# EAGLE board mech-mockup (EAGLE 6.5.0)
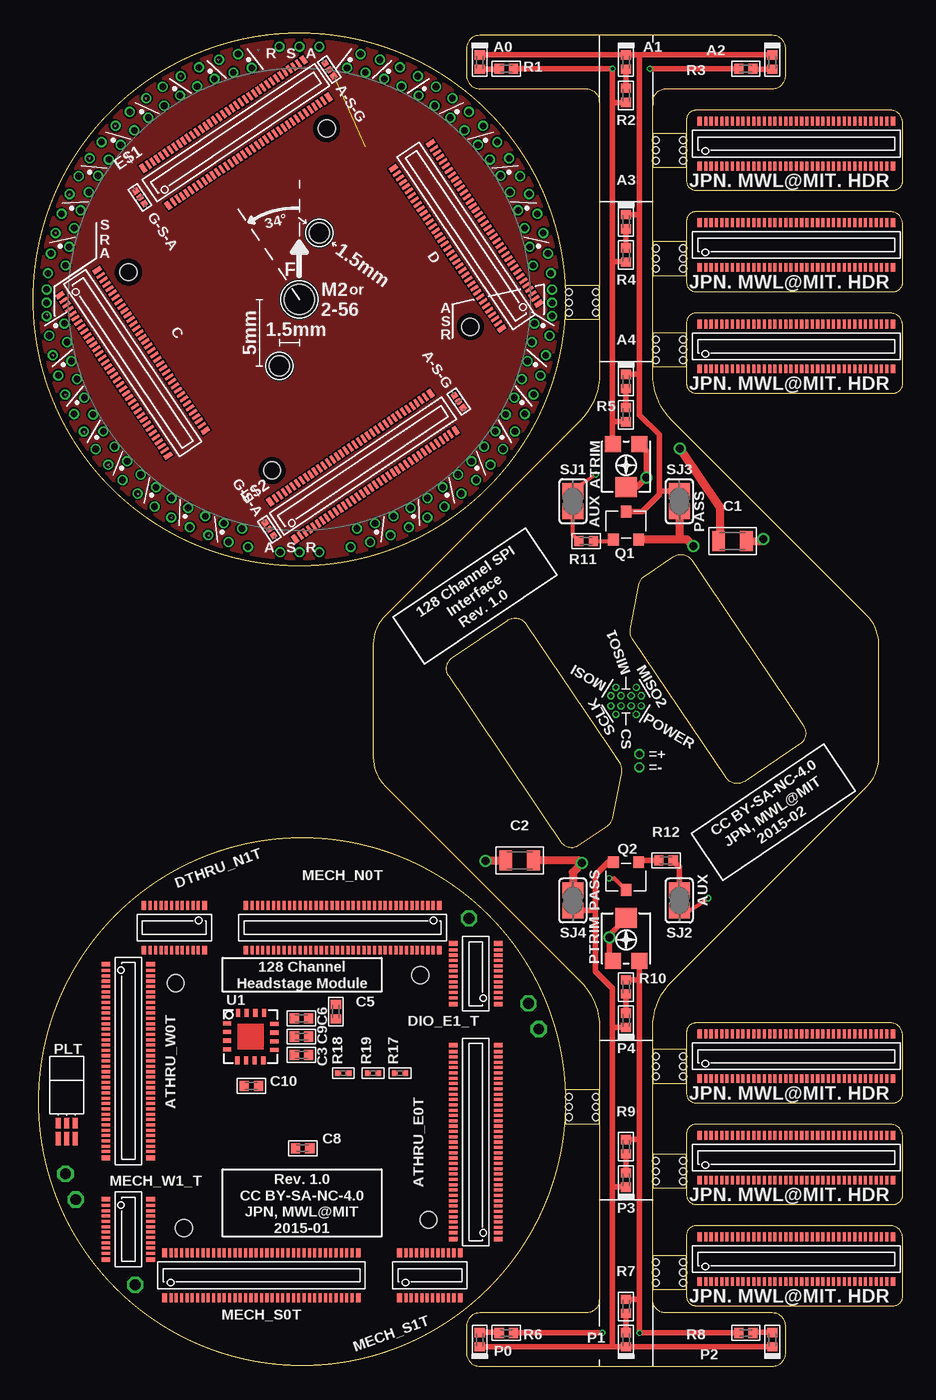
[diagram p0: board, top side]
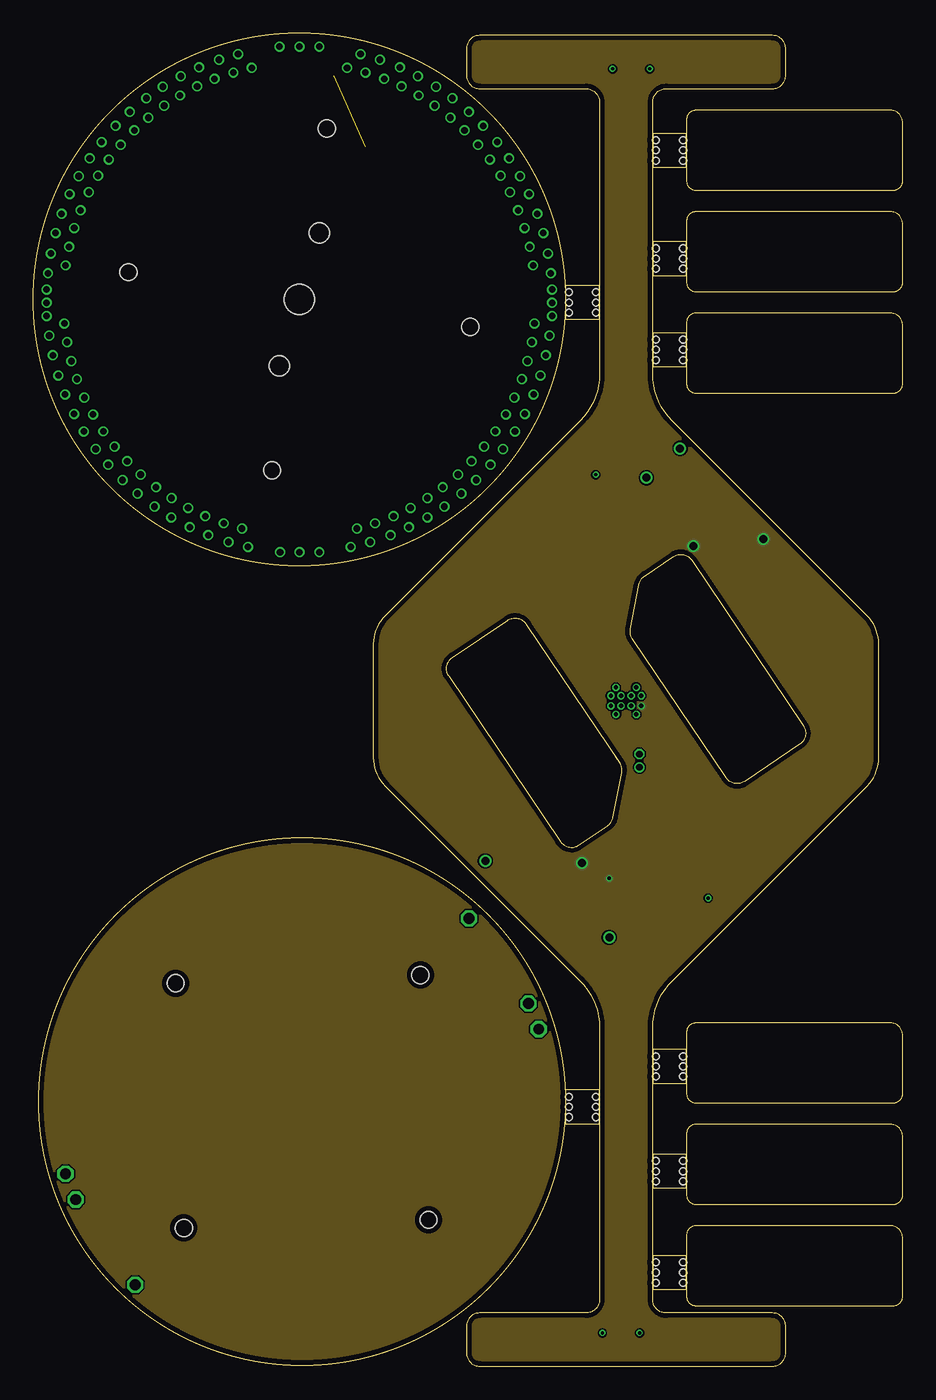
[diagram p1: board, inner layer Route2]
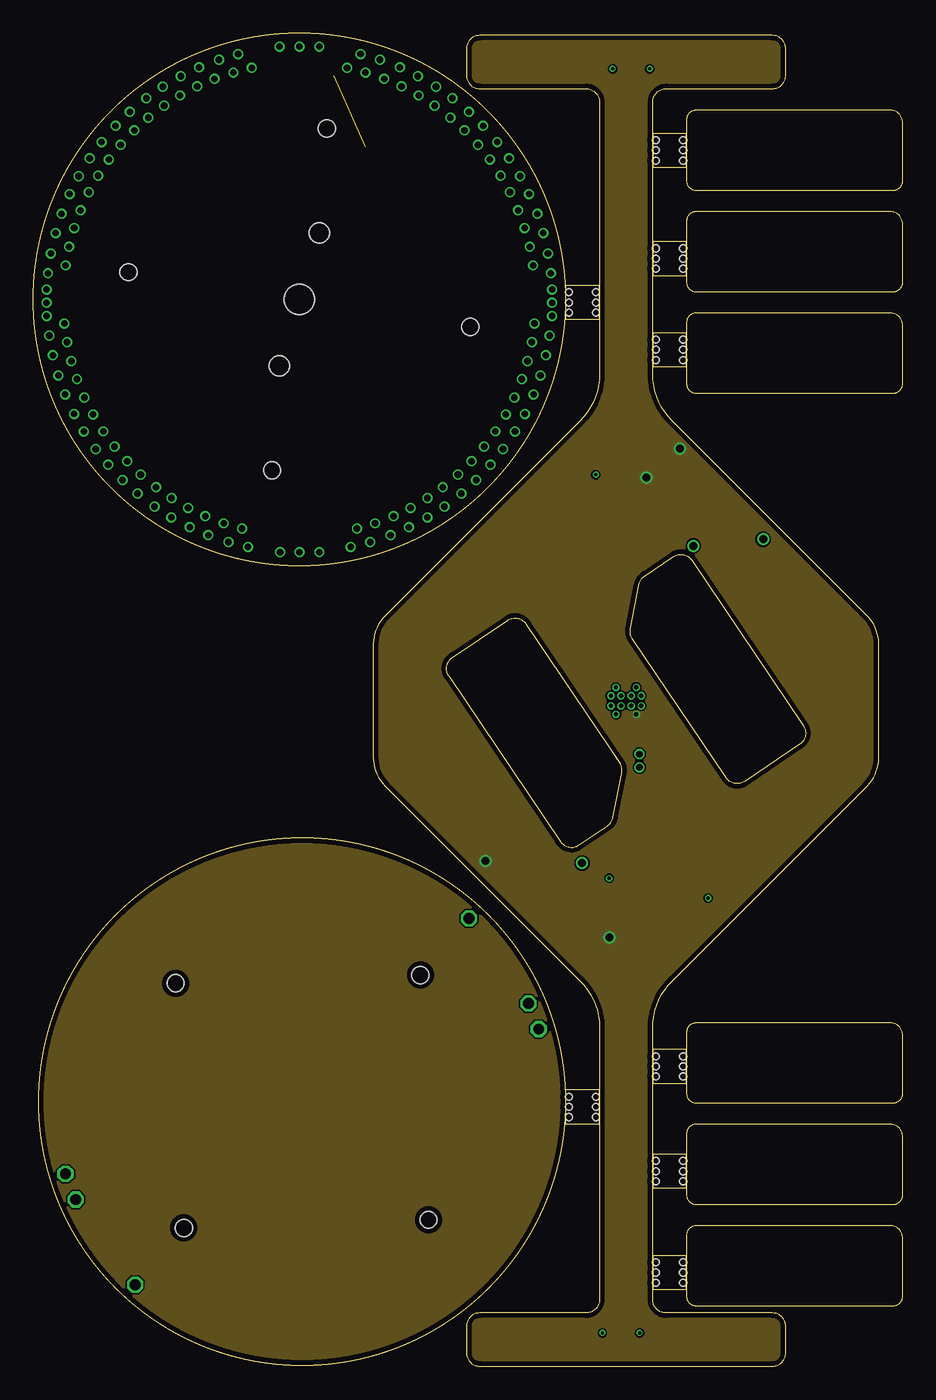
[diagram p2: board, inner layer Route15]
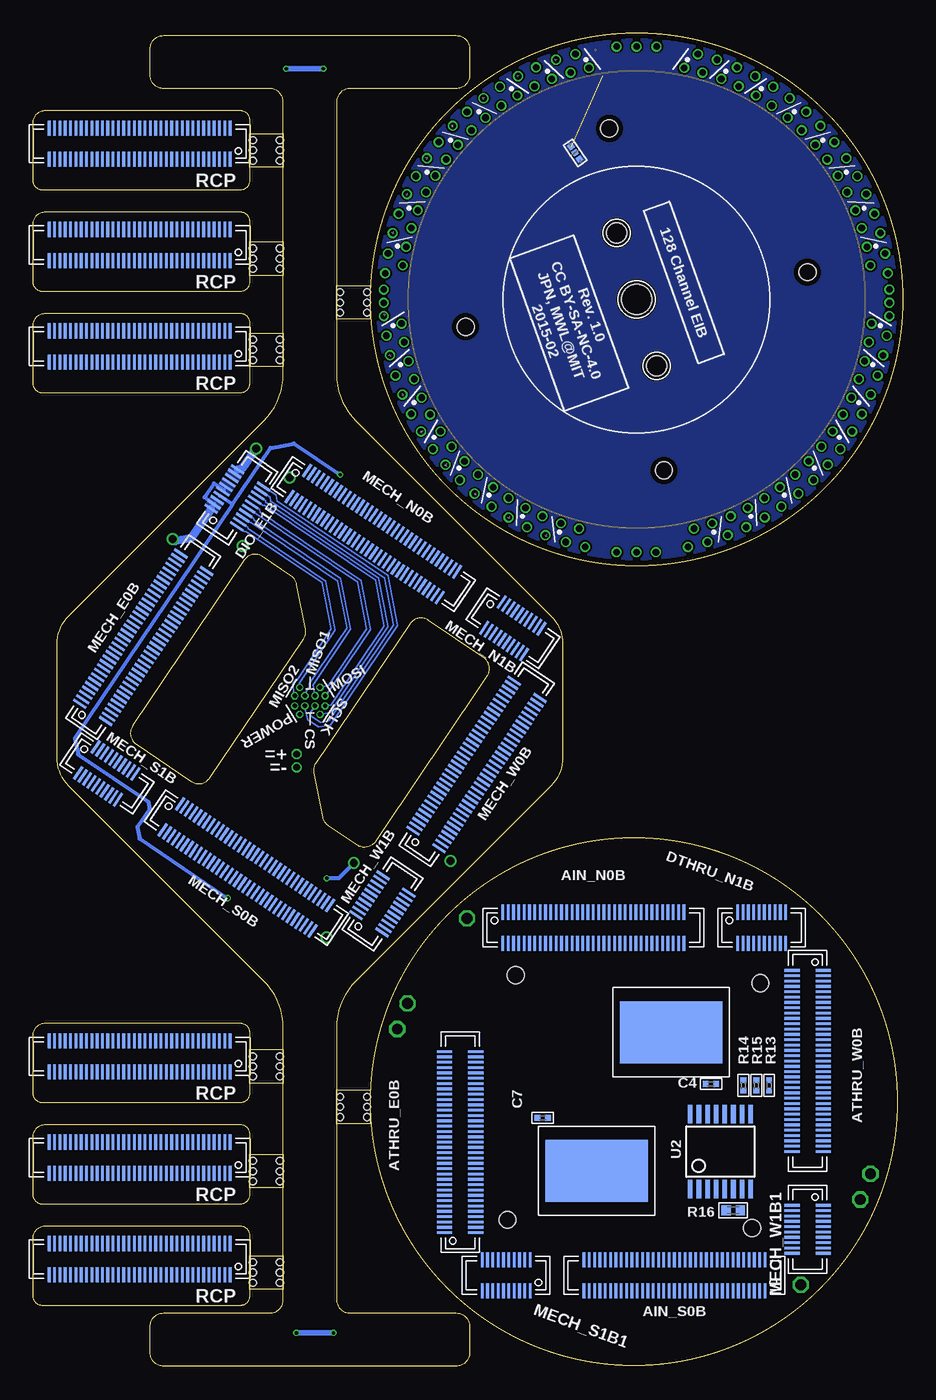
[diagram p3: board, bottom side, seen from below]

Size 65.35 x 100.16 mm. Coordinates in mm from the lower left corner, seen from the top.
Outline: 44.07,45.35 37.04,55.78 arc90 35.65,56.05 31.5,53.26 arc90 31.23,51.87 39.62,39.43 arc90 41.01,39.16 43.15,40.61 arc45 43.57,41.25 44.23,44.6 arc45 44.07,45.35
Outline: 44.07,45.35 43.75,45.83
Outline: 47.56,96 55.56,96 arc90 56.56,97 56.56,99 arc90 55.56,100 33.56,100 arc90 32.56,99 32.56,97 arc90 33.56,96 41.56,96 arc-90 42.56,95 42.56,74.57 arc-45 41.09,71.04 26.43,56.38 arc45 25.56,54.26 25.56,45.74 arc45 26.43,43.62 41.09,28.96 arc-45 42.56,25.43 42.56,5 arc-90 41.56,4 33.56,4 arc90 32.56,3 32.56,1 arc90 33.56,0 55.56,0 arc90 56.56,1 56.56,3 arc90 55.56,4 47.56,4 arc-90 46.56,5 46.56,25.43 arc-45 48.02,28.96 62.68,43.62 arc45 63.56,45.74 63.56,54.26 arc45 62.68,56.38 48.02,71.04 arc-45 46.56,74.57 46.56,95 arc-90 47.56,96
Outline: 52.08,44.22 45.04,54.65 arc-45 44.88,55.4 45.54,58.75 arc-45 45.96,59.39 48.1,60.84 arc-90 49.49,60.57 57.88,48.13 arc-90 57.61,46.74 53.46,43.95 arc-90 52.08,44.22
Outline: 40.02,81.21 40.02,78.67 42.56,78.67 42.56,81.21 40.02,81.21
Outline: 40.02,20.75 40.02,18.21 42.56,18.21 42.56,20.75 40.02,20.75
Outline: 49.8,88.37 64.64,88.37 arc90 65.35,89.08 65.35,93.47 arc90 64.44,94.37 49.8,94.37 arc90 49.1,93.66 49.1,89.08 arc90 49.8,88.37
Outline: 49.8,80.75 64.64,80.75 arc90 65.35,81.46 65.35,85.85 arc90 64.44,86.75 49.8,86.75 arc90 49.1,86.04 49.1,81.46 arc90 49.8,80.75
Outline: 49.8,73.13 64.64,73.13 arc90 65.35,73.84 65.35,78.23 arc90 64.44,79.13 49.8,79.13 arc90 49.1,78.42 49.1,73.84 arc90 49.8,73.13
Outline: 49.8,19.79 64.64,19.79 arc90 65.35,20.5 65.35,24.89 arc90 64.44,25.79 49.8,25.79 arc90 49.1,25.08 49.1,20.5 arc90 49.8,19.79
Outline: 49.8,12.17 64.64,12.17 arc90 65.35,12.88 65.35,17.27 arc90 64.44,18.17 49.8,18.17 arc90 49.1,17.46 49.1,12.88 arc90 49.8,12.17
Outline: 49.8,4.55 64.64,4.55 arc90 65.35,5.26 65.35,9.65 arc90 64.44,10.55 49.8,10.55 arc90 49.1,9.84 49.1,5.26 arc90 49.8,4.55
Outline: 46.56,92.64 46.56,90.1 49.1,90.1 49.1,92.64 46.56,92.64
Outline: 46.56,84.51 46.56,81.97 49.1,81.97 49.1,84.51 46.56,84.51
Outline: 46.56,77.65 46.56,75.11 49.1,75.11 49.1,77.65 46.56,77.65
Outline: 46.56,23.8 46.56,21.26 49.1,21.26 49.1,23.8 46.56,23.8
Outline: 46.56,15.93 46.56,13.39 49.1,13.39 49.1,15.93 46.56,15.93
Outline: 46.56,8.31 46.56,5.77 49.1,5.77 49.1,8.31 46.56,8.31
Outline: circle at 20,80.16 radius 20
Outline: circle at 20,80.16 radius 20
Outline: circle at 20.2,19.89 radius 19.81
Copper layers (1*2*15*16): Top 0.035559375mm / dielectric 0.17018125mm / Route2 0.01778125mm / dielectric 47mil / Route15 0.01778125mm / dielectric 0.17018125mm / Bottom 0.035559375mm
Design rules "ohs-park-4-layer": minimum track width 5mil, minimum drill 10mil, track to track 5mil, track to pad 5mil, pad to pad 5mil, via to via 5mil, smd to smd 5mil, copper to edge 15mil, drill to drill 5mil, minimum pad ring 4mil, minimum via ring 4mil, stop-mask expansion 4mil, vias tented up to drill 100mil, thermal gap 10mil
Net classes: 1 thick: width 0.102 mm
Holes 1.27 mm at 22.06,93.01 32.85,78.11 17.94,67.32 7.15,82.22 10.7,28.78 29.09,29.39 29.7,11 11.31,10.39
Holes 0.51 mm at 40.27,80.7 40.27,79.94 40.27,79.17 42.3,79.17 42.3,79.94 42.3,80.7 40.27,20.25 40.27,19.48 40.27,18.72 42.3,18.72 42.3,19.48 42.3,20.25 46.81,92.13 46.81,91.37 46.81,90.6 48.84,90.6 48.84,91.37 48.84,92.13 46.81,84 46.81,83.24 46.81,82.48 48.84,82.48 48.84,83.24 48.84,84 46.81,77.14 46.81,76.38 46.81,75.62 48.84,75.62 48.84,76.38 48.84,77.14 46.81,23.29 46.81,22.53 46.81,21.77 48.84,21.77 48.84,22.53 48.84,23.29 46.81,15.42 46.81,14.66 46.81,13.9 48.84,13.9 48.84,14.66 48.84,15.42 46.81,7.8 46.81,7.04 46.81,6.28 48.84,6.28 48.84,7.04 48.84,7.8

## Footprints (pad centres in the part's own frame; a part is rotated, then mirrored left to right if it is on the bottom)
LED-0402 = smd 0.762 x 0.686: A 0,-0.533; C 0,0.533
GOLDPIN_0.5ID_0.7OD = drill 0.5 pad 0.7: P$1 0,0
DF40-70REC = smd 0.2 x 1.14: 1 -6.8,1.17; 2 -6.4,1.17; 3 -6,1.17; 4 -5.6,1.17; 5 -5.2,1.17; 6 -4.8,1.17; 7 -4.4,1.17; 8 -4,1.17; 9 -3.6,1.17; 10 -3.2,1.17; 11 -2.8,1.17; 12 -2.4,1.17; 13 -2,1.17; 14 -1.6,1.17; 15 -1.2,1.17; 16 -0.8,1.17; 17 -0.4,1.17; 18 0,1.17; 19 0.4,1.17; 20 0.8,1.17; 21 1.2,1.17; 22 1.6,1.17; 23 2,1.17; 24 2.4,1.17; 25 2.8,1.17; 26 3.2,1.17; 27 3.6,1.17; 28 4,1.17; 29 4.4,1.17; 30 4.8,1.17; 31 5.2,1.17; 32 5.6,1.17; 33 6,1.17; 34 6.4,1.17; 35 6.8,1.17; 36 6.8,-1.17; 37 6.4,-1.17; 38 6,-1.17; 39 5.6,-1.17; 40 5.2,-1.17; 41 4.8,-1.17; 42 4.4,-1.17; 43 4,-1.17; 44 3.6,-1.17; 45 3.2,-1.17; 46 2.8,-1.17; 47 2.4,-1.17; 48 2,-1.17; 49 1.6,-1.17; 50 1.2,-1.17; 51 0.8,-1.17; 52 0.4,-1.17; 53 0,-1.17; 54 -0.4,-1.17; 55 -0.8,-1.17; 56 -1.2,-1.17; 57 -1.6,-1.17; 58 -2,-1.17; 59 -2.4,-1.17; 60 -2.8,-1.17; 61 -3.2,-1.17; 62 -3.6,-1.17; 63 -4,-1.17; 64 -4.4,-1.17; 65 -4.8,-1.17; 66 -5.2,-1.17; 67 -5.6,-1.17; 68 -6,-1.17; 69 -6.4,-1.17; 70 -6.8,-1.17
DF40-70HEAD = smd 0.23 x 0.66: 1 -6.8,-1.685; 2 -6.4,-1.685; 3 -6,-1.685; 4 -5.6,-1.685; 5 -5.2,-1.685; 6 -4.8,-1.685; 7 -4.4,-1.685; 8 -4,-1.685; 9 -3.6,-1.685; 10 -3.2,-1.685; 11 -2.8,-1.685; 12 -2.4,-1.685; 13 -2,-1.685; 14 -1.6,-1.685; 15 -1.2,-1.685; 16 -0.8,-1.685; 17 -0.4,-1.685; 18 0,-1.685; 19 0.4,-1.685; 20 0.8,-1.685; 21 1.2,-1.685; 22 1.6,-1.685; 23 2,-1.685; 24 2.4,-1.685; 25 2.8,-1.685; 26 3.2,-1.685; 27 3.6,-1.685; 28 4,-1.685; 29 4.4,-1.685; 30 4.8,-1.685; 31 5.2,-1.685; 32 5.6,-1.685; 33 6,-1.685; 34 6.4,-1.685; 35 6.8,-1.685; 36 6.8,1.685; 37 6.4,1.685; 38 6,1.685; 39 5.6,1.685; 40 5.2,1.685; 41 4.8,1.685; 42 4.4,1.685; 43 4,1.685; 44 3.6,1.685; 45 3.2,1.685; 46 2.8,1.685; 47 2.4,1.685; 48 2,1.685; 49 1.6,1.685; 50 1.2,1.685; 51 0.8,1.685; 52 0.4,1.685; 53 0,1.685; 54 -0.4,1.685; 55 -0.8,1.685; 56 -1.2,1.685; 57 -1.6,1.685; 58 -2,1.685; 59 -2.4,1.685; 60 -2.8,1.685; 61 -3.2,1.685; 62 -3.6,1.685; 63 -4,1.685; 64 -4.4,1.685; 65 -4.8,1.685; 66 -5.2,1.685; 67 -5.6,1.685; 68 -6,1.685; 69 -6.4,1.685; 70 -6.8,1.685 | smd 0.35 x 0.66: M1 -7.275,-1.685; M2 7.275,-1.685; M3 7.275,1.685; M4 -7.275,1.685
EIA/EIAJ = smd 1.2 x 1.2: A -1,-1.8; E 1,-1.8 | smd 1.6 x 1.5: S 0,1.45
0805 = smd 0.965 x 1.524: 1 -1.041,0; 2 1.041,0
0402 = smd 0.686 x 0.762: 1 -0.533,0; 2 0.533,0
0201 = smd 0.432 x 0.432: 1 -0.394,0; 2 0.394,0
SPI_WIRE+ = drill 0.33 octagon: P$1 0,0
SPI_WIRE- = drill 0.33: P$1 0,0
DF40-20HEAD = smd 0.23 x 0.66: 1 -1.8,-1.685; 2 -1.4,-1.685; 3 -1,-1.685; 4 -0.6,-1.685; 5 -0.2,-1.685; 6 0.2,-1.685; 7 0.6,-1.685; 8 1,-1.685; 9 1.4,-1.685; 10 1.8,-1.685; 11 1.8,1.685; 12 1.4,1.685; 13 1,1.685; 14 0.6,1.685; 15 0.2,1.685; 16 -0.2,1.685; 17 -0.6,1.685; 18 -1,1.685; 19 -1.4,1.685; 20 -1.8,1.685 | smd 0.35 x 0.66: M1 -2.275,-1.685; M2 2.275,-1.685; M3 2.275,1.685; M4 -2.275,1.685
DF40-20REC = smd 0.2 x 1.14: 1 -1.8,1.17; 2 -1.4,1.17; 3 -1,1.17; 4 -0.6,1.17; 5 -0.2,1.17; 6 0.2,1.17; 7 0.6,1.17; 8 1,1.17; 9 1.4,1.17; 10 1.8,1.17; 11 1.8,-1.17; 12 1.4,-1.17; 13 1,-1.17; 14 0.6,-1.17; 15 0.2,-1.17; 16 -0.2,-1.17; 17 -0.6,-1.17; 18 -1,-1.17; 19 -1.4,-1.17; 20 -1.8,-1.17
RHD2164_COB_MECH = smd 7.722 x 4.674: CENTER 0,0
TESTPOINT_SMALL = drill 0.813 octagon: 1 0,0
OMNETICS_PZN-06-AA = smd 0.381 x 0.762: B1 0.635,-1.016; B2 0,-1.016; B3 -0.635,-1.016 | smd 0.381 x 1.016: T1 0.635,-2.159; T2 0,-2.159; T3 -0.635,-2.159
SOT23-GSD = smd 0.8 x 0.9: D 0,0; G -0.95,-2.1; S 0.95,-2.1
SJ = smd 1.168 x 1.6: 1 -0.762,0; 2 0.762,0
SJ_2_0201 = smd 0.432 x 0.432: 1 -0.559,0; 2 0.559,0; COM 0,0
TETRODE_128_0.5ID_0.7OD = drill 0.5 pad 0.703: 0 0.724,17.743; 1 1.562,18.934; 2 2.14,17.628; 3 3.058,18.748
ADXL335 = smd 0.61 x 0.305: COM1 -1.775,-0.3; NC1 -1.775,1; NC2 -1.775,-0.95; NC3 1.775,-1; NC4 1.775,0.3; ST -1.775,0.35; XOUT 1.775,0.95; YOUT 1.775,-0.35 | smd 0.305 x 0.61: COM2 -1,-1.775; COM3 -0.35,-1.775; COM4 0.3,-1.775; NC5 1,1.775; NC6 -0.95,1.775; VS1 0.35,1.775; VS2 -0.3,1.775; ZOUT 0.95,-1.775
TSSOP-16 = smd 0.348 x 1.397: 1 -2.273,-2.814; 2 -1.623,-2.815; 3 -0.973,-2.815; 4 -0.323,-2.815; 5 0.327,-2.815; 6 0.977,-2.815; 7 1.627,-2.815; 8 2.277,-2.815; 9 2.277,2.825; 10 1.627,2.825; 11 0.977,2.825; 12 0.327,2.825; 13 -0.323,2.825; 14 -0.973,2.825; 15 -1.623,2.825; 16 -2.273,2.825
EIB_MOUNT_A = hole 2.261: 0,0 | hole 1.5: 1.5,5; -1.5,-5

## Placement (x,y rotation side)
A0  RED  [LED-0402]  33.56,98 0 top
A1  RED  [LED-0402]  44.56,98 0 top
A2  RED  [LED-0402]  55.56,98 0 top
A3  RED  [LED-0402]  44.56,86 0 top
A4  RED  [LED-0402]  44.56,74 0 top
AGND_A0  LRG_GP  [GOLDPIN_0.5ID_0.7OD]  21.5,99.16 0 top
AGND_A1  LRG_GP  [GOLDPIN_0.5ID_0.7OD]  1,78.91 0 top
AGND_B0  LRG_GP  [GOLDPIN_0.5ID_0.7OD]  18.55,61.16 34 top
AGND_B1  LRG_GP  [GOLDPIN_0.5ID_0.7OD]  39,80.91 34 top
AIN_N0B  DF40REC  [DF40-70REC]  23.25,32.95 0 bottom
AIN_S0B  DF40REC  [DF40-70REC]  17.16,6.83 180 bottom
ATHRU_A_BOT  DF40REC  [DF40-70REC]  57.35,91.87 180 bottom
ATHRU_A_BOT1  DF40REC  [DF40-70REC]  57.35,84.25 180 bottom
ATHRU_A_BOT2  DF40REC  [DF40-70REC]  57.35,76.63 180 bottom
ATHRU_A_BOT3  DF40REC  [DF40-70REC]  57.35,23.29 180 bottom
ATHRU_A_BOT4  DF40REC  [DF40-70REC]  57.35,15.67 180 bottom
ATHRU_A_BOT5  DF40REC  [DF40-70REC]  57.35,8.05 180 bottom
ATHRU_A_TOP  DF40HEAD  [DF40-70HEAD]  57.35,91.87 0 top
ATHRU_A_TOP1  DF40HEAD  [DF40-70HEAD]  57.35,84.25 0 top
ATHRU_A_TOP2  DF40HEAD  [DF40-70HEAD]  57.35,76.63 0 top
ATHRU_A_TOP3  DF40HEAD  [DF40-70HEAD]  57.35,23.29 0 top
ATHRU_A_TOP4  DF40HEAD  [DF40-70HEAD]  57.35,15.67 0 top
ATHRU_A_TOP5  DF40HEAD  [DF40-70HEAD]  57.35,8.05 0 top
ATHRU_E0B  DF40REC  [DF40-70REC]  33.26,16.84 90 bottom
ATHRU_E0T  DF40HEAD  [DF40-70HEAD]  33.26,16.84 90 top
ATHRU_W0B  DF40REC  [DF40-70REC]  7.15,22.94 270 bottom
ATHRU_W0T  DF40HEAD  [DF40-70HEAD]  7.15,22.94 270 top
ATRIM  2k  [EIA/EIAJ]  44.56,67.5 180 top
C  DF40HEAD  [DF40-70HEAD]  7.47,75.39 304 top
C1  10uF  [0805]  52.56,62 0 top
C2  10uF  [0805]  36.56,38 0 top
C3  .1uF  [0402]  20.15,23.4 0 top
C4  10n  [0201]  14.41,21.21 0 bottom
C5  .1uF  [0402]  22.74,26.65 270 top
C6  .1uF  [0402]  20.15,26.14 180 top
C7  10n  [0201]  27.06,18.67 180 bottom
C8  .1uF  [0402]  20.25,16.39 180 top
C9  .1uF  [0402]  20.15,24.77 180 top
C10  .1uF  [0402]  16.39,21.06 0 top
CS+  TP_SPI_WIRE+  [SPI_WIRE+]  44.17,49.62 90 top
CS-  TP_SPI_WIRE-  [SPI_WIRE-]  44.94,49.62 90 top
D  DF40HEAD  [DF40-70HEAD]  32.53,84.94 124 top
DIO_E1_T  DF40HEAD  [DF40-20HEAD]  33.26,29.49 90 top
DIO_E1B  [DF40-20REC]  50.01,65.26 56 bottom
DTHRU_N1B  DF40REC  [DF40-20REC]  10.6,32.95 0 bottom
DTHRU_N1T  DF40HEAD  [DF40-20HEAD]  10.6,32.95 180 top
E$1  [DF40-70HEAD]  15.23,92.69 34 top
E$2  [DF40-70HEAD]  24.77,67.64 34 top
E$3  [RHD2164_COB_MECH]  23,14.68 0 bottom
E$4  [RHD2164_COB_MECH]  17.41,25.1 0 bottom
GND  TP_SPI_WIRE-  [SPI_WIRE-]  45.7,49.62 0 top
GND1  GND  [TESTPOINT_SMALL]  37.22,27.26 0 top
GND.  GND  [TESTPOINT_SMALL]  3.19,12.52 0 top
MECH_E0B  [DF40-70REC]  57.08,54.77 56 bottom
MECH_N0B  [DF40-70REC]  39.78,62.53 326 bottom
MECH_N0T  DF40HEAD  [DF40-70HEAD]  23.25,32.95 180 top
MECH_N1B  [DF40-20REC]  29.29,55.45 326 bottom
MECH_S0B  [DF40-70REC]  49.33,37.47 326 bottom
MECH_S0T  DF40HEAD  [DF40-70HEAD]  17.16,6.83 0 top
MECH_S1B  [DF40-20REC]  59.82,44.55 326 bottom
MECH_S1B1  DF40REC  [DF40-20REC]  29.8,6.83 180 bottom
MECH_S1T  DF40HEAD  [DF40-20HEAD]  29.8,6.83 0 top
MECH_W0B  [DF40-70REC]  32.03,45.23 56 bottom
MECH_W1_T  DF40HEAD  [DF40-20HEAD]  7.15,10.29 270 top
MECH_W1B  [DF40-20REC]  39.1,34.74 56 bottom
MECH_W1B1  DF40REC  [DF40-20REC]  7.15,10.29 270 bottom
MIS02+  TP_SPI_WIRE+  [SPI_WIRE+]  45.7,50.38 90 top
MISO1+  TP_SPI_WIRE+  [SPI_WIRE+]  44.94,50.38 90 top
MISO1-  TP_SPI_WIRE-  [SPI_WIRE-]  44.17,50.38 90 top
MISO2-  TP_SPI_WIRE-  [SPI_WIRE-]  45.32,51.02 90 top
MOSI+  TP_SPI_WIRE+  [SPI_WIRE+]  43.79,51.02 90 top
MOSI-  TP_SPI_WIRE-  [SPI_WIRE-]  43.41,50.38 90 top
P0  BLUE  [LED-0402]  33.56,2 180 top
P1  BLUE  [LED-0402]  44.56,2 180 top
P2  BLUE  [LED-0402]  55.56,2 180 top
P3  BLUE  [LED-0402]  44.56,14 180 top
P4  BLUE  [LED-0402]  44.56,26 180 top
PLT  PZN-06  [OMNETICS_PZN-06-AA]  2.52,19.28 0 top
PTRIM  2k  [EIA/EIAJ]  44.56,32.24 0 top
Q1  SSM3K324  [SOT23-GSD]  44.56,64.22 0 top
Q2  SSM3J328  [SOT23-GSD]  44.56,35.78 180 top
R1  82  [0402]  35.56,97.49 0 top
R2  82  [0402]  44.56,95.5 270 top
R3  82  [0402]  53.56,97.49 180 top
R4  82  [0402]  44.56,83.5 270 top
R5  82  [0402]  44.56,71.5 270 top
R6  82  [0402]  35.56,2.5 0 top
R7  82  [0402]  44.56,4.5 90 top
R8  82  [0402]  53.56,2.5 180 top
R9  82  [0402]  44.56,16.5 90 top
R10  82  [0402]  44.56,28.5 90 top
R11  470  [0402]  41.56,62 180 top
R12  470  [0402]  47.56,38 0 top
R13  100k  [0201]  10.04,21.11 270 bottom
R14  100k  [0201]  11.01,21.11 270 bottom
R15  100k  [0201]  11.97,21.11 270 bottom
R16  0  [0402]  12.74,11.71 180 bottom
R17  100  [0201]  27.57,22.02 0 top
R18  100  [0201]  23.3,22.02 0 top
R19  100  [0201]  25.54,22.02 0 top
REF1  REF  [TESTPOINT_SMALL]  7.66,6.12 0 top
REF2  REF  [TESTPOINT_SMALL]  32.75,33.66 0 top
REF_A0  LRG_GP  [GOLDPIN_0.5ID_0.7OD]  18.5,99.16 0 top
REF_A1  LRG_GP  [GOLDPIN_0.5ID_0.7OD]  1,79.91 0 top
REF_B0  LRG_GP  [GOLDPIN_0.5ID_0.7OD]  21.5,61.16 34 top
REF_B1  LRG_GP  [GOLDPIN_0.5ID_0.7OD]  39,79.91 34 top
SCLK+  TP_SPI_WIRE+  [SPI_WIRE+]  43.41,49.62 90 top
SCLK-  TP_SPI_WIRE-  [SPI_WIRE-]  43.79,48.98 270 bottom
SHLD_A0  LRG_GP  [GOLDPIN_0.5ID_0.7OD]  20,99.16 0 top
SHLD_A1  LRG_GP  [GOLDPIN_0.5ID_0.7OD]  1,80.91 0 top
SHLD_B0  LRG_GP  [GOLDPIN_0.5ID_0.7OD]  20,61.16 34 top
SHLD_B1  LRG_GP  [GOLDPIN_0.5ID_0.7OD]  39,78.91 34 top
SJ1  AUX  [SJ]  40.56,65 270 top
SJ2  AUX  [SJ]  48.56,35 90 top
SJ3  PASS  [SJ]  48.56,65 270 top
SJ4  PASS  [SJ]  40.56,35 90 top
SJ_A0  [SJ_2_0201]  22.26,97.43 124 top
SJ_A1  [SJ_2_0201]  8.03,87.84 304 top
SJ_A2  [SJ_2_0201]  24.62,91.18 124 bottom
SJ_B0  [SJ_2_0201]  17.74,62.9 304 top
SJ_B1  [SJ_2_0201]  31.97,72.49 124 top
TET0  0  [TETRODE_128_0.5ID_0.7OD]  20,80.16 350.7 bottom
TET1  1  [TETRODE_128_0.5ID_0.7OD]  20,80.16 341.3 bottom
TET2  2  [TETRODE_128_0.5ID_0.7OD]  20,80.16 332 bottom
TET3  3  [TETRODE_128_0.5ID_0.7OD]  20,80.16 322.6 bottom
TET4  4  [TETRODE_128_0.5ID_0.7OD]  20,80.16 313.2 bottom
TET5  5  [TETRODE_128_0.5ID_0.7OD]  20,80.16 303.9 bottom
TET6  6  [TETRODE_128_0.5ID_0.7OD]  20,80.16 294.5 bottom
TET7  7  [TETRODE_128_0.5ID_0.7OD]  20,80.16 285.2 bottom
TET8  8  [TETRODE_128_0.5ID_0.7OD]  20,80.16 266.5 bottom
TET9  9  [TETRODE_128_0.5ID_0.7OD]  20,80.16 257.2 bottom
TET10  10  [TETRODE_128_0.5ID_0.7OD]  20,80.16 247.8 bottom
TET11  11  [TETRODE_128_0.5ID_0.7OD]  20,80.16 238.4 bottom
TET12  12  [TETRODE_128_0.5ID_0.7OD]  20,80.16 229.1 bottom
TET13  13  [TETRODE_128_0.5ID_0.7OD]  20,80.16 219.7 bottom
TET14  14  [TETRODE_128_0.5ID_0.7OD]  20,80.16 210.4 bottom
TET15  15  [TETRODE_128_0.5ID_0.7OD]  20,80.16 201 bottom
TET16  16  [TETRODE_128_0.5ID_0.7OD]  20,80.16 201 top
TET17  17  [TETRODE_128_0.5ID_0.7OD]  20,80.16 210.4 top
TET18  18  [TETRODE_128_0.5ID_0.7OD]  20,80.16 219.7 top
TET19  19  [TETRODE_128_0.5ID_0.7OD]  20,80.16 229.1 top
TET20  20  [TETRODE_128_0.5ID_0.7OD]  20,80.16 238.4 top
TET21  21  [TETRODE_128_0.5ID_0.7OD]  20,80.16 247.8 top
TET22  22  [TETRODE_128_0.5ID_0.7OD]  20,80.16 257.2 top
TET23  23  [TETRODE_128_0.5ID_0.7OD]  20,80.16 266.5 top
TET24  24  [TETRODE_128_0.5ID_0.7OD]  20,80.16 285.2 top
TET25  25  [TETRODE_128_0.5ID_0.7OD]  20,80.16 294.5 top
TET26  26  [TETRODE_128_0.5ID_0.7OD]  20,80.16 303.9 top
TET27  27  [TETRODE_128_0.5ID_0.7OD]  20,80.16 313.2 top
TET28  28  [TETRODE_128_0.5ID_0.7OD]  20,80.16 322.6 top
TET29  29  [TETRODE_128_0.5ID_0.7OD]  20,80.16 332 top
TET30  30  [TETRODE_128_0.5ID_0.7OD]  20,80.16 341.3 top
TET31  31  [TETRODE_128_0.5ID_0.7OD]  20,80.16 350.7 top
U1  ADXL335  [ADXL335]  16.34,24.77 0 top
U2  74HC4053  [TSSOP-16]  13.7,16.13 0 bottom
U$1  [EIB_MOUNT_A]  20,80.16 0 top
VCC  TP_SPI_WIRE+  [SPI_WIRE+]  45.32,48.98 0 top
VCC1  VCC  [TESTPOINT_SMALL]  37.98,25.33 0 top
VCC2  VCC  [TESTPOINT_SMALL]  2.42,14.45 0 top

## Library data of the parts
A0 A1-A4 AGND_A0 AGND_A1 AGND_B0 AGND_B1 AIN_N0B AIN_S0B ATHRU_A_BOT ATHRU_A_BOT1-ATHRU_A_BOT5 ATHRU_A_TOP ATHRU_A_TOP1-ATHRU_A_TOP5 ATHRU_E0B ATHRU_E0T ATHRU_W0B ATHRU_W0T C C6 C9 C10 CS+ CS- D DIO_E1_T DIO_E1B DTHRU_N1B DTHRU_N1T E$1-E$4 GND GND1 GND. MECH_E0B MECH_N0B MECH_N0T MECH_N1B MECH_S0B MECH_S0T MECH_S1B MECH_S1B1 MECH_S1T MECH_W0B MECH_W1_T MECH_W1B MECH_W1B1 MIS02+ MISO1+ MISO1- MISO2- MOSI+ MOSI- P0 P1-P4 PLT Q1 Q2 R1-R10 R17-R19 REF1 REF2 REF_A0 REF_A1 REF_B0 REF_B1 SCLK+ SCLK- SHLD_A0 SHLD_A1 SHLD_B0 SHLD_B1 SJ_A0 SJ_A1 SJ_A2 SJ_B0 SJ_B1 TET0 TET1-TET31 U1 U2 U$1 VCC VCC1 VCC2 = jonnew
ATRIM C5 PTRIM R11 R12 = headstage
C1 C2 = headstage; MN: TDK Corp.; PARTNO: C2012X5R1Cxxxxxxx; VID: DK
C3 C4 C7 C8 R13-R16 = RHD2000_eval_board
SJ1-SJ4 = jumper

## Nets
AUXOUTB: DIO_E1B.4 SJ1.1 SJ2.1
B2: P0.C P1.C P2.C P3.C P4.C Q2.S SJ4.1
CS+: CS+.P$1 DIO_E1B.12
CS-: CS-.P$1 DIO_E1B.11
F1: A0.C A1.C A2.C A3.C A4.C Q1.D SJ3.1
GND: C1.2 C2.2 DIO_E1B.1 DIO_E1B.2 DIO_E1B.3 DIO_E1B.5 DIO_E1B.6 DIO_E1B.7 GND.P$1 Q1.S Q2.D SJ3.2 SJ4.2
GND1: SJ_A0.1 SJ_A1.1 SJ_A2.1 SJ_A2.2 SJ_B0.1 SJ_B1.1
MIS02-: DIO_E1B.19 MISO2-.P$1
MISO1+: DIO_E1B.18 MISO1+.P$1
MISO1-: DIO_E1B.17 MISO1-.P$1
MISO2+: DIO_E1B.20 MIS02+.P$1
MOSI+: DIO_E1B.16 MOSI+.P$1
MOSI-: DIO_E1B.15 MOSI-.P$1
N$1: ATRIM.E R1.2 R2.2 R3.2 R4.2 R5.2
N$2: P0.A R6.1
N$3: A0.A R1.1
N$4: R12.2 SJ2.2
N$5: Q2.G R12.1
N$6: PTRIM.E R6.2 R7.2 R8.2 R9.2 R10.2
N$8: A1.A R2.1
N$9: A2.A R3.1
N$10: A3.A R4.1
N$11: P3.A R9.1
N$12: P1.A R7.1
N$13: P2.A R8.1
N$14: A4.A R5.1
N$15: P4.A R10.1
N$28: Q1.G R11.1
N$34: R11.2 SJ1.2
REF_A0: REF_A0.P$1
REF_A1: REF_A1.P$1
REF_B0: REF_B0.P$1
REF_B1: REF_B1.P$1
S$7 [thick]: U2.8
S$10 [thick]: U2.16
SCLK+: DIO_E1B.14 SCLK+.P$1
SCLK-: DIO_E1B.13 SCLK-.P$1
VCC: ATRIM.A ATRIM.S C1.1 C2.1 DIO_E1B.8 DIO_E1B.9 DIO_E1B.10 PTRIM.A PTRIM.S VCC.P$1

## Tracks (layer width: path | path; a pad name or v marks a point on that pad's centre or on a via)
AUXOUTB  (via drill 0.25)
  Top 0.305: v50.73,35.17 48.8,33.87 SJ2.1 | v42.28,67 40.52,65.81 SJ1.1
  Bottom 0.305: DIO_E1B.4 50.37,64.78 | 50.37,64.78 62.22,47.21 61.98,45.97 56.71,42.42 56.61,41.89 57.53,40.52 57.36,39.64 v50.73,35.17 | 50.37,64.78 47.52,69 45.75,69.34 v42.28,67
B2
  Top 0.406: 42.27,34.24 42.27,36.92 43.22,37.88 Q2.S | 42.27,34.24 42.27,29.68 43.54,28.41 43.54,25.47 | 43.54,25.47 43.54,13.47 | 43.54,13.47 43.54,1.47 | SJ4.1 42.27,34.24 | P4.C 43.54,25.47 | P3.C 43.54,13.47 | 43.54,1.47 P1.C P2.C | 43.54,1.47 P0.C
CS+
  Bottom 0.127: DIO_E1B.12 47.56,65.3 47.51,65.01 38.94,59.23 38.25,55.71 43.11,48.51 43.75,48.38 44.48,48.87 44.52,49.1 CS+.P$1
CS-
  Bottom 0.127: DIO_E1B.11 47.11,65.47 47.02,65.02 38.7,59.41 37.97,55.67 43.02,48.19 43.9,48.02 44.74,48.59 CS-.P$1
F1
  Top 0.406: 45.57,74.53 45.57,71.48 47.06,70 47.06,65.76 | 45.57,74.53 45.57,86.53 | 45.57,86.53 45.57,98.53 | A0.C A1.C 45.57,98.53 | 45.57,98.53 A2.C | A3.C 45.57,86.53 | A4.C 45.57,74.53 | SJ3.1 47.06,65.76 | 47.06,65.76 47.06,65.5 46.06,64.5 45.78,64.22 Q1.D
GND  (via drill 0.25, 0.6)
  Top 0.305: v43.29,36.66 43.67,36.66 Q2.D | 45.57,62.22 45.57,62.19 Q1.S
  Top 0.61: C1.2 53.83,62.16 | C1.2 53.66,61.94 | C2.2 41.06,38 v41.25,37.81 40.56,37.11 SJ4.2 | C1.2 54.72,62 v54.86,62.14 | v49.61,61.64 49.13,62.12 48.56,62.12 | 48.56,62.12 Q1.S | SJ3.2 48.56,62.12
  Bottom 0.305: 51.76,66.35 | 51.76,66.35 52.47,65.29 51.73,64.8 DIO_E1B.2 | 51.76,66.35 51.02,65.85 | v41.25,37.81 42.4,36.66 v43.29,36.66
  Bottom 0.61: DIO_E1B.1 53.47,62.23 54.65,62 v54.86,62.14
  pour Route2 (no thermals): 31.63,-1.85 31.38,2.47 33.16,4.24 39.51,5.26 41.03,9.58 41.54,24.56 35.7,33.71 24.78,42.85 25.03,56.82 36.97,68.25 41.03,75.87 40.78,82.48 39.51,90.35 32.4,96.19 31.63,100.26 72.5,103.34 72.5,-3.34
  pour Bottom (no thermals): 51.1,64.83 51.52,64.2 52.37,64.77 51.94,65.4
  pour Bottom (no thermals): 50.24,66.09 50.67,65.46 51.51,66.03 51.09,66.66
GND1  (1 unrouted)
  pour Top (no thermals): 13.15,44.9 -15.26,87.02 26.85,115.43 55.26,73.31
  pour Bottom (no thermals): 13.15,44.9 -15.26,87.02 26.85,115.43 55.26,73.31
GND2
  pour Route2 (no thermals): 0.39,19.89 arc-90 20.2,39.7 arc-90 40.02,19.89 arc-90 20.2,0.08 arc-90
MIS02-
  Bottom 0.127: MISO2-.P$1 45.37,51.29 42.66,55.31 43.38,59.01 49.22,62.95 49.23,63.05 | DIO_E1B.19 49.23,63.05 | 49.23,63.05
MISO1+
  Bottom 0.127: MISO1+.P$1 44.97,50.53 44.58,51.09 44.62,51.27 41.78,55.48 42.46,59.01 48.96,63.39 49.01,63.38 | DIO_E1B.18 49.01,63.38 | 49.01,63.38
MISO1-
  Bottom 0.127: DIO_E1B.17 48.77,63.7 48.74,63.58 42.23,59.19 41.5,55.4 44.33,51.19 MISO1-.P$1
MISO2+
  Bottom 0.127: MIS02+.P$1 45.87,51.24 45.67,51.52 45.53,51.55 42.95,55.38 43.63,58.87 49.36,62.74 49.46,62.72 DIO_E1B.20
MOSI+
  Bottom 0.127: DIO_E1B.16 48.56,64.04 48.57,64.04 40.98,58.93 40.3,55.4 43.17,51.15 MOSI+.P$1
MOSI-
  Bottom 0.127: 48.34,64.37 DIO_E1B.15 | MOSI-.P$1 43.37,50.35 40,55.34 40.72,59.06 48.3,64.17 48.34,64.37 | 48.34,64.37
N$1  (via drill 0.25)
  Top 0.406: 43.54,94.96 v43.54,97.5 R1.2 | 43.54,94.96 43.54,82.99 | 43.54,82.99 43.54,70.97 | 43.54,70.97 43.54,69.3 ATRIM.E | R2.2 44.56,94.96 43.54,94.96 | R3.2 47.86,97.49 v46.33,97.5 | R5.2 43.54,70.97 | 43.54,82.99 44.56,82.99 R4.2
  Bottom 0.406: v43.54,97.5 v46.33,97.5
N$2
  Top 0.406: P0.A 35.02,2.53 R6.1
N$3
  Top 0.406: A0.A 35,97.47 R1.1
N$4
  Top 0.406: R12.2 48.56,37.53 SJ2.2
N$5
  Top 0.305: 45.77,38 45.63,38 Q2.G
  Top 0.406: R12.1 45.77,38
N$6  (via drill 0.25)
  Top 0.406: PTRIM.E 45.57,30.44 45.57,29.03 | 45.57,29.03 45.57,17.03 | 45.57,17.03 45.57,5.03 | 45.57,5.03 v45.57,2.5 R8.2 | R10.2 45.57,29.03 | R9.2 45.57,17.03 | R7.2 45.57,5.03 | R6.2 v42.78,2.5
  Bottom 0.406: v42.78,2.5 v45.57,2.5
N$7  (via drill 0.5)
  other vias: 45.56,46
N$8
  Top 0.406: R2.1 A1.A
N$9
  Top 0.406: A2.A 54.09,97.47 R3.1
N$10
  Top 0.406: R4.1 A3.A
N$11
  Top 0.406: P3.A R9.1
N$12
  Top 0.406: R7.1 P1.A
N$13
  Top 0.406: P2.A 54.09,2.53 R8.1
N$14
  Top 0.406: R5.1 A4.A
N$15
  Top 0.406: R10.1 P4.A
N$16  (via drill 0.5)
  other vias: 45.56,45
N$28
  Top 0.305: R11.1 43.48,62 Q1.G
N$34
  Top 0.305: R11.2 40.56,62.47 SJ1.2
SCLK+
  Bottom 0.127: DIO_E1B.14 48.12,64.71 48.08,64.68 48,64.7 39.64,59.06 38.97,55.64 42.98,49.7 SCLK+.P$1
SCLK-
  Bottom 0.127: DIO_E1B.13 47.89,65.04 47.88,64.95 39.4,59.24 38.69,55.57 43.03,49.13 SCLK-.P$1
VCC  (via drill 0.6)
  Top 0.406: ATRIM.A 46.08,68.78 v46.08,66.76 45.37,66.05 ATRIM.S | PTRIM.A 43.29,30.71 v43.29,32.22 43.29,32.42 PTRIM.S
  Top 0.61: v48.61,68.97 51.63,64.5 51.63,62.11 C1.1 | v33.98,37.97 34.02,38 C2.1
  Bottom 0.61: DIO_E1B.10 49.62,67.48 v48.61,68.97
  pour Route15 (no thermals): 32.4,-2.36 31.89,3.23 33.16,4.24 41.54,5.51 41.03,28.12 29.09,39.55 25.28,41.58 24.52,55.55 33.67,64.44 41.03,73.33 41.03,92.89 32.9,95.94 30.87,100 72.5,103.34 72.5,-3.34
  pour Bottom (no thermals): 49.96,66.51 49.53,67.15 50.38,67.71 50.8,67.08
VCC1
  pour Route15 (no thermals): 0.39,19.89 arc-90 20.2,39.7 arc-90 40.02,19.89 arc-90 20.2,0.08 arc-90

## Text on the board
tPlace: R | S | A | A-S-G | JPN. MWL@MIT. HDR | S | R | G-S-A | 34° | A | JPN. MWL@MIT. HDR | A | S | R | A-S-G | JPN. MWL@MIT. HDR | G-S-A | AUX | PASS | A | S | R | 128 Channel SPI / Interface / Rev. 1.0 | MISO1 | MOSI | MISO2 | SCLK | POWER | CS | =+ | =- | CC BY-SA-NC-4.0 / JPN, MWL@MIT / 2015-02 | PASS | AUX | 128 Channel / Headstage Module | JPN. MWL@MIT. HDR | JPN. MWL@MIT. HDR | Rev. 1.0 / CC BY-SA-NC-4.0 / JPN, MWL@MIT / 2015-01 | JPN. MWL@MIT. HDR
bPlace: RCP | RCP | 128 Channel EIB | Rev. 1.0 / CC BY-SA-NC-4.0 / JPN, MWL@MIT / 2015-02 | RCP | MISO1 | MOSI | MISO2 | SCLK | POWER | CS | =+ | =- | RCP | RCP | RCP